# Altium PCB HallEffectSensor.PcbDoc
Units mm, origin at the board's own origin, x right, y up, seen from the top; angles counter-clockwise.
Board outline 17.4 x 13.08 mm, 2 copper layers (Top Layer, Bottom Layer); 4 components, 3 nets, 13 pads, 0 vias.
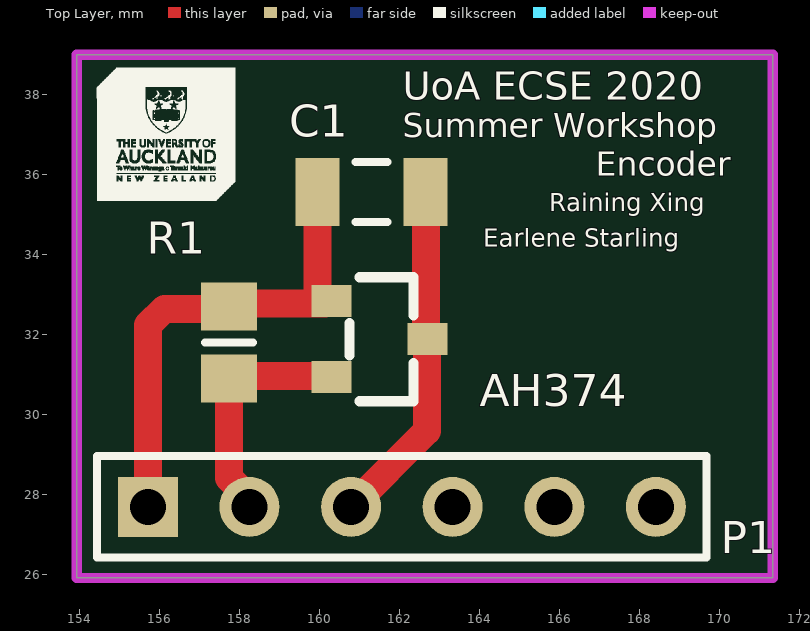
[diagram p0: Top Layer view]
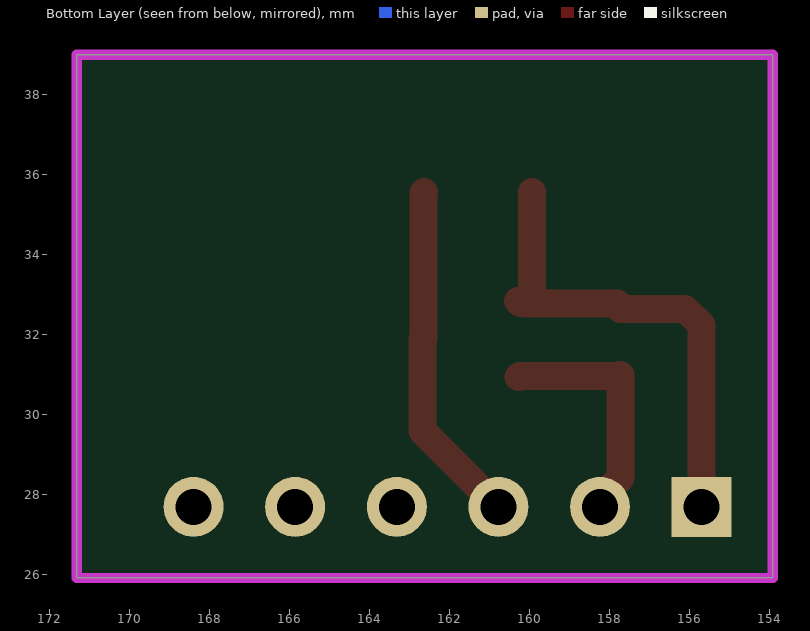
[diagram p1: Bottom Layer view, seen from below]

## Layer stack, top to bottom
Top Solder: solder mask 0.0102, Solder Resist, Dk 3.5
Top Layer: signal copper 0.0356
Dielectric 1: dielectric 0.32, FR-4, Dk 4.8
Bottom Layer: signal copper 0.0356
Bottom Solder: solder mask 0.0102, Solder Resist, Dk 3.5

## Board outline
153.924,25.908 153.924,38.989 171.323,38.989 171.323,25.908

## Design rules (kind name [scope] priority, off if disabled: settings)
Clearance [All] p1: gap=0.4 ignorepadtopadclearanceinfootprint=FALSE
HoleSize [All] p1: absolutevalues=TRUE maxlimit=6.2 minlimit=0.2 maxpercent=80.000 minpercent=20.000
PolygonConnect [All] p1: connectstyle=Relief reliefconductorwidth=0.254 reliefentries=4 polygonreliefangle="90 Angle" airgapwidth=0.254
RoutingVias [All] p1: holewidth=0.711 width=1.27 viastyle="Through Hole" minholewidth=0.711 minwidth=1.27 maxholewidth=0.711 maxwidth=1.27
SolderMaskExpansion [All] p1: expansion=0.102 istentingtop=FALSE
Width [All] p1: maxlimit=1 minlimit=0.15 preferedwidth=0.4
29 further rules are at their usual default settings.

## Components (designator, comment, footprint, x,y, rotation, side; value= is the part's Value field where it differs from the comment)
AH374 "Component_1" Component_1 160.29,31.877 r270 top (schematic designator *)
C1 "68nF" C1206 161.29,35.56 r0 top value=?
P1 "Header" HDR1X6 155.702,27.686 r0 top
R1 "Resistor 0805" R0805 157.734,31.802 r270 top value=68k

## Footprints (in the part's own frame and the unit in brackets; to place one, negate y for a bottom-side part, rotate by r counter-clockwise, add the part's x,y. Pads: shape width x height; smd on the part's side, far side on the other; paste and mask are expansions set on the pad)
C1206 [mm] "Chip Capacitor, Body 3.2x1.6mm, IPC High Density"
  rect 1.1x1.7 smd: 1(-1.35,0) 2(1.35,0)
  silkscreen extent -0.4,-0.75 0.4,0.75, body extent -1.7,-0.9 1.7,0.9, height 1.3
Component_1 [mm]
  rect 0.8x1 smd: 1(-0.95,0) 2(0,2.4) 3(0.95,0)
  silkscreen extent -1.55,0.45 1.55,2.05, body extent -1.65,0.44 1.55,2.25, height 1.15
HDR1X6 [mm] "Connector; Header; 6 Position"
  rect 1.5x1.5 hole 0.9: 1(0,0)
  round 1.5 hole 0.9: 2(2.54,0) 3(5.08,0) 4(7.62,0) 5(10.16,0) 6(12.7,0)
  silkscreen extent -1.27,-1.27 13.97,1.27
R0805 [mm]
  rect 1.2x1.4 smd: 1(-0.9,0) 2(0.9,0)
  silkscreen extent 0,-0.6 0,0.6, body extent -1.04,-0.63 0.99,0.64, height 0.6

## Part data
C1: library part CCAP0805, "CCAP0805", MPN=68nF, Part Description=?, Type="Surface Mount"
P1: library part "Header 6", "Header, 6-Pin", LatestRevisionDate=17-Jul-2002, LatestRevisionNote="Re-released for DXP Platform.", Publisher="Altium Limited"
R1: library part RES0805, "RES0805", MPN=?, Part Description=?, Type="Surface Mount"

## Nets (pads, with @x,y where several pads share a name; then routed paths per layer and width w, separated by ;. In a path a pad name is that pad's centre, name@x,y a point inside that pad or via, vN(x,y) a via of type N, cw(c..) or ccw(c..) an arc to the next point about the centre after c; other vN are vias at no path point)
GND: AH374.2 C1.2 P1.3 | length 8.7
  Top Layer w0.7: P1.3 162.674,29.578 162.674,31.877 162.657,31.894 162.657,35.543 C1.2
OUT: AH374.3 P1.2 R1.2 | length 6.1
  Top Layer w0.7: P1.2 158.242,27.902 157.734,28.41 157.734,30.977 157.759,30.952 160.249,30.952 AH374.3@160.274,30.927
Vdd: AH374.1 C1.1 P1.1 R1.1 | length 12.2
  Top Layer w0.7: P1.1 155.702,32.229 156.112,32.639 R1.1@157.734,32.639 ; R1.1 157.798,32.766 160.129,32.766 160.14,32.777 160.24,32.777 AH374.1 ; C1.1 159.94,32.961 AH374.1@160.124,32.777
pads on no net: P1.4 P1.5 P1.6

## Keep-outs
Keep-Out Layer:
  lines w0.254: 153.924,25.908 171.323,25.908 171.323,29.146 171.323,36.893 171.323,38.989 153.924,38.989 153.924,25.908

## Silkscreen, mask and mechanical layers (free items; w line width, h text height)
Top Overlay:
  drawing of 24 lines, arcs and shapes, not listed
  text "UoA ECSE 2020" at 162.075,37.869 h0.7
  text "Summer Workshop" at 162.075,36.926 h0.6
  text "Encoder" at 166.901,35.964 h0.6
  text "Raining Xing" at 165.733,35.073 h0.45
  text "Earlene Starling" at 164.082,34.184 h0.45
Mechanical 1:
  the board outline again, w0.254